# Altium PCB SOLC5-G031.PcbDoc
Units mm, origin at the board's own origin, x right, y up, seen from the top; angles counter-clockwise.
Board outline 110 x 89 mm, 2 copper layers (Top Layer, Bottom Layer), stack 1.536 mm thick; 72 components, 48 nets, 273 pads, 265 vias.
Unrouted connection lines stored in the file: 18.
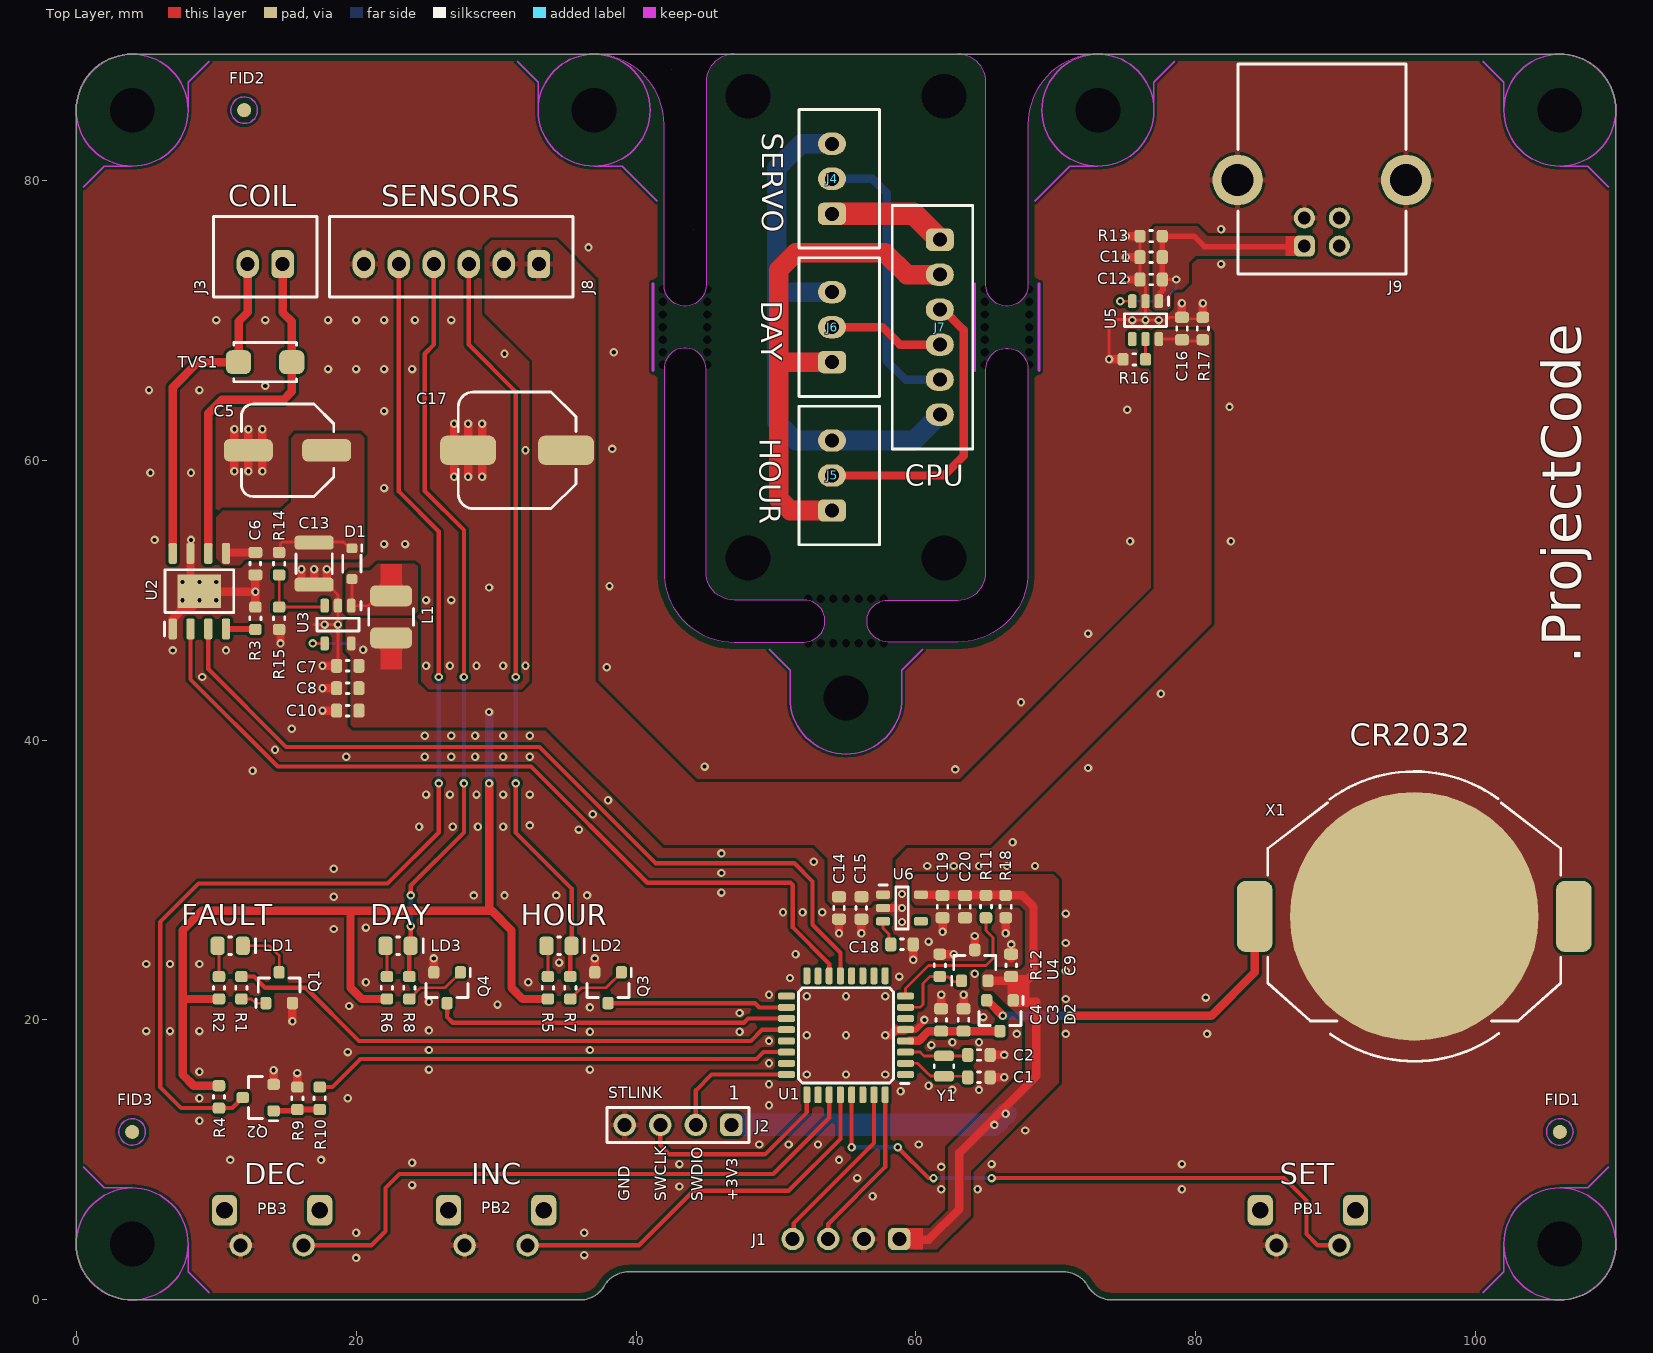
[diagram p0: Top Layer view]
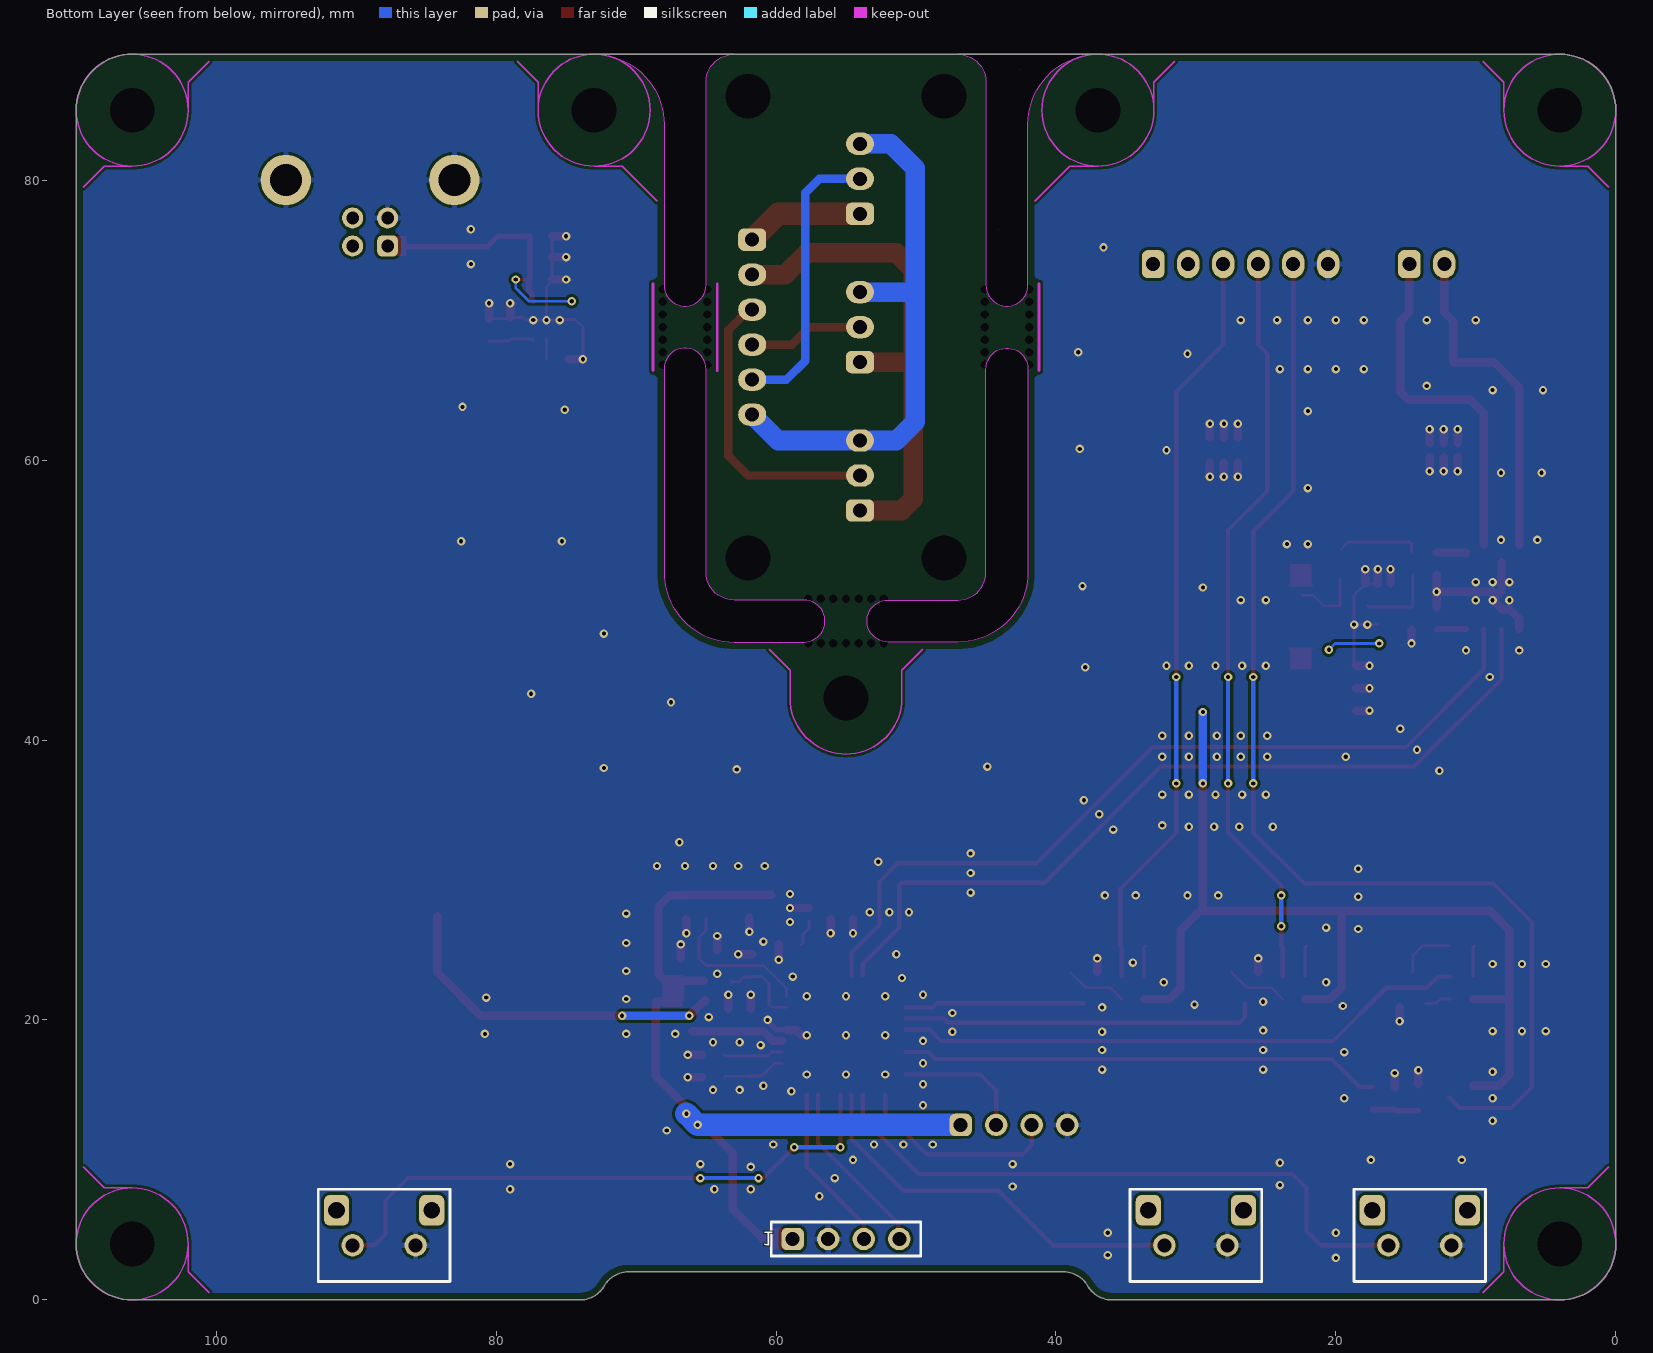
[diagram p1: Bottom Layer view, seen from below]

## Layer stack, top to bottom
Top Solder: solder mask 0.0254, SM-001, Dk 4
Top Layer: signal copper 0.018
Dielectric 1: core 1.5, FR-4 TG140, Dk 3.96
Bottom Layer: signal copper 0.018
Bottom Solder: solder mask 0.0254, SM-001, Dk 4

## Board outline
4,0 36,0 ccw(c36,2) 37.732,1 cw(c39.464,0) 39.464,2 70.536,2 cw(c70.536,0) 72.268,1 ccw(c74,2) 74,0 106,0 ccw(c106,4) 110,4 110,85 ccw(c106,85) 106,89 73,89 63,89 4,89 ccw(c4,85) 0,85 0,4 ccw(c4,4)
cut-out: 47,50 cw(c47,52) 45,52 45,66.503 ccw(c43.5,66.5) 42,66.498 42,52 ccw(c47,52) 47,47 52,47 ccw(c52,48.5) 52,50
cut-out: 42,72.5 42,84 ccw(c37,84) 37,89 47,89 ccw(c47,87) 45,87 45,72.5 cw(c43.5,72.5)
cut-out: 58,47 cw(c58,48.5) 58,50 57.996,50 63,50 ccw(c63,52) 65,52 65,66.5 cw(c66.5,66.5) 68,66.5 68,52 cw(c63,52) 63,47
cut-out: 65,72.5 65,87 ccw(c63,87) 63,89 73,89 ccw(c73,84) 68,84 68,72.5 cw(c66.5,72.5)
cut-out: 42.5,87.9
cut-out: 44.1,76.45

## Design rules (kind name [scope] priority, off if disabled: settings)
AcuteAngle [All] p1: minimum=0.00000000000000E+0000 checktracksonly=TRUE
AssemblyTestpoint [All] p1: testpointundercomponent=TRUE minsize=1 maxsize=2.5 preferedsize=1.5 minholesize=0 maxholesize=1 preferedholesize=0.8 testpointgrid=0.025 usegrid=TRUE gridtolerance=0 allowsidetop=TRUE allowsidebottom=TRUE
BoardOutlineClearance [(OnLayer('Top Layer') OR OnLayer('Bottom Layer'))] p1: gap=0.5 ignorepadtopadclearanceinfootprint=FALSE
Clearance Clearance_J2 [HasFootprint('HLE-120-02-F-DV-BE')] p1: gap=0.2 ignorepadtopadclearanceinfootprint=FALSE except(0: Arc-Hole Track-Hole SMDPad-THPad SMDPad-Hole THPad-Hole Via-Hole Fill-Hole Poly-Hole Region-Hole Text-Hole)
Clearance [All] p2: gap=0.2 ignorepadtopadclearanceinfootprint=FALSE except(0: Arc-Hole Track-Hole SMDPad-Hole THPad-Hole Via-Hole Fill-Hole Poly-Hole Region-Hole Text-Hole)
ComponentClearance "ComponentClearance FID" [Footprint Like('FID-1*')] p1: gap=0 collisioncheckmode=3 verticalgap=0 showdistances=FALSE
ComponentClearance ComponentClearance_SCAP [HasFootprint('C-SCCT20B106PRB-ORIZ')] p2: gap=0 collisioncheckmode=3 verticalgap=0 showdistances=FALSE
ComponentClearance ComponentClearance_EXT [HasFootprint('SSQ-120-03-D-BOTTOM')] p3: gap=0 collisioncheckmode=3 verticalgap=0 showdistances=FALSE
ComponentClearance [All] p4: gap=0.2 collisioncheckmode=3 verticalgap=0.2 showdistances=FALSE
DiffPairsRouting [All] p1: maxlimit=0.4 minlimit=0.2 mostfreqgap=0.2 toplayer_minwidth=0.3 toplayer_maxwidth=0.4 toplayer_prefwidth=0.3 bottomlayer_minwidth=0.3 bottomlayer_maxwidth=0.4 bottomlayer_prefwidth=0.3 maxuncoupledlength=12
FabricationTestpoint [All] p1: side=3 testpointundercomponent=TRUE minsize=1 maxsize=2.5 preferedsize=1.5 minholesize=0 maxholesize=1 preferedholesize=0.8 testpointgrid=0.025 allowsidetop=TRUE allowsidebottom=TRUE usegrid=TRUE gridtolerance=0
Height [All] p1: minheight=0 maxheight=50 prefheight=12
HoleSize [All] p1: absolutevalues=TRUE maxlimit=6 minlimit=0.3 maxpercent=80.000 minpercent=20.000
HoleToHoleClearance [All] p1: gap=0.3 allowstackedmicrovias=TRUE
MinimumAnnularRing [All] p1: minimumring=0.15
MinimumSolderMaskSliver [All] p1: minsoldermaskwidth=0.15
PlaneClearance [All] p1: clearance=0.3
PlaneConnect PlaneConnect_GND [(InNet('GND') and IsPad)] p1: pad.planeconnectstyle=Relief pad.reliefexpansion=0.3 pad.reliefentries=4 pad.reliefconductorwidth=0.5 pad.reliefairgap=0.2 via.planeconnectstyle=Direct via.reliefexpansion=0.3 via.reliefentries=4 via.reliefconductorwidth=0.5 via.reliefairgap=0.2
PlaneConnect [All] p2: planeconnectstyle=Direct reliefexpansion=0.5 reliefentries=4 reliefconductorwidth=0.2 reliefairgap=0.2
PolygonConnect [All] p1: thpad.connectstyle=Relief thpad.reliefconductorwidth=0.4 thpad.reliefentries=4 thpad.polygonreliefangle="90 Angle" thpad.airgapwidth=0.2 smdpad.connectstyle=Direct smdpad.reliefconductorwidth=0.3 smdpad.reliefentries=4 smdpad.polygonreliefangle="90 Angle" smdpad.airgapwidth=0.2 via.connectstyle=Direct via.reliefconductorwidth=0.2 via.reliefentries=4 via.polygonreliefangle="90 Angle" via.airgapwidth=0.2
RoutingCorners [All] p1: cornerstyle=45-Degree minsetback=0.5 maxsetback=2
RoutingVias [All] p1: holewidth=0.3 width=0.6 viastyle="Through Hole" minholewidth=0.3 minwidth=0.6 maxholewidth=0.6 maxwidth=1
SMDEntry [All] p1: side=TRUE corner=FALSE anyangle=TRUE
SMDToCorner [All] p1: distance=0
SilkToSilkClearance [All] p1: silktosilkclearance=0.1
SilkToSolderMaskClearance [IsPad] p1: minsilkscreentomaskgap=0.1 clearancetoexposedcopper=FALSE
SolderMaskExpansion SolderMaskExpansion_Via [IsVia] p1: expansion=0.102 istentingtop=TRUE
SolderMaskExpansion SolderMaskExpansion-NPTH [PadIsPlated = 'False'] p2: expansion=0.1 istentingtop=FALSE soldermaskfromhole=TRUE
SolderMaskExpansion [All] p3: expansion=0.05 istentingtop=FALSE
SupplyNets SupplyNets_GND [InNet('GND')] p1: voltage=0,000
SupplyNets SupplyNets+5V [InNet('+5V')] p2: voltage=5,000
SupplyNets SupplyNets+3V3 [InNet('+3V3')] p3: voltage=3,000
UnRoutedNet UnRoutedNet_No_GND [not InNet('GND')] p1: checkbadconnections=TRUE
Width [All] p1: maxlimit=5 minlimit=0.2 preferedwidth=0.2 minimp=50.000000 maximp=50.000000 favimp=50.000000
16 further rules are at their usual default settings.

## Components (designator, comment, footprint, x,y, rotation, side; value= is the part's Value field where it differs from the comment)
C1 "6pF" C0603-H90 64.5,15.9 r180 top value=6p
C2 "6pF" C0603-H90 64.5,17.5 r180 top value=6p
C3 "4.7µF" C0603-H90 63.4,20 r270 top value=4.7u
C4 "100nF" C0603-H90 61.8,20 r270 top value=100n
C5 "22µF" C-AE-C6-H60 15.1,60.7 r180 top value=22u
C6 "100nF" C0603-H90 12.8,52.6 r270 top value=100n
C7 "100nF" C0603-H90 19.4,45.3 r0 top value=100n
C8 "4.7µF" C0603-H90 19.4,43.7 r0 top value=4.7u
C9 "100nF" C0603-H90 66.8,23.9 r270 top value=100n
C10 "4.7µF" C0603-H90 19.4,42.1 r0 top value=4.7u
C11 "4.7µF" C0603-H90 76.8,74.5 r0 top value=4.7u
C12 "100nF" C0603-H90 76.8,72.9 r0 top value=100n
C13 "10µF" C1210-H250 17,52.6 r90 top value=10u
C14 "4.7µF" C0603-H90 54.5,28 r90 top value=4.7u
C15 "100nF" C0603-H90 56.1,28 r90 top value=100n
C16 "100nF" C0603-H90 79,69.4 r270 top value=100n
C17 "470µF" C-AE-D8-H102 31.5,60.7 r180 top value=470u
C18 "100nF" C0603-H90 59,25.4 r180 top value=100n
C19 "100nF" C0603-H90 61.9,28.1 r90 top value=100n
C20 "4.7µF" C0603-H90 63.5,28.1 r90 top value=4.7u
D1 "ZLLS400QTC" SOD-323 19.7,52.6 r270 top
D2 "BAT5405E6327HTSA1" SOT-23 66,20.3 r270 top
FID1 "Local Fiducial" FID-1-2MM 106,12 r0 top
FID2 "Local Fiducial" FID-1-2MM 12,85 r0 top
FID3 "Local Fiducial" FID-1-2MM 4,12 r0 top
J1 "OLED" SSQ-104-01-S-BOTTOM 55,4.35 r180 top
J2 "STLINK" HDR-V-1R-04P-5.8L 43,12.5 r270 top
J3 "COIL" "JST B2B-XH-A" 13.5,74 r180 top
J4 "SERVO" "JST B3B-XH-A" 54,80.1 r90 top
J5 "HOUR" "JST B3B-XH-A" 54,58.9 r90 top
J6 "DAY" "JST B3B-XH-A" 54,69.5 r90 top
J7 "CPU" "JST B6B-XH-A" 61.7,69.5 r270 top
J8 "SENSORS" "JST B6B-XH-A" 26.8,74 r180 top
J9 "POWER" 67068-8000 89,76.3 r180 top
L1 "10µH" IND-LQH43CN 22.5,48.8 r90 top value=10u
LD1 "FAULT" LED-0805-O 11,25.3 r180 top
LD2 "HOUR" LED-0805-O 34.5,25.3 r180 top
LD3 "DAY" LED-0805-O 23,25.3 r180 top
PB1 "SET" BUT-1-1825027-1-BOTTOM 88,3.9 r0 top locked
PB2 "INC" BUT-1-1825027-1-BOTTOM 30,3.9 r0 top locked
PB3 "DEC" BUT-1-1825027-1-BOTTOM 14,3.9 r0 top locked
Q1 "BSS138K-13" SOT-23 14.5,22.3 r90 top
Q2 "BSS138K-13" SOT-23 13,14.45 r180 top
Q3 "BSS138K-13" SOT-23 38,22.3 r270 top
Q4 "BSS138K-13" SOT-23 26.5,22.3 r270 top
R1 "470Ω" R0603-H55 11.8,22.3 r270 top value=470
R2 "4.7KΩ" R0603-H55 10.2,22.3 r270 top value=4.7K
R3 "1MΩ" R0603-H55 12.8,48.7 r270 top value=1M
R4 "4.7KΩ" R0603-H55 10.2,14.5 r90 top value=4.7K
R5 "4.7KΩ" R0603-H55 33.7,22.3 r270 top value=4.7K
R6 "4.7KΩ" R0603-H55 22.2,22.3 r270 top value=4.7K
R7 "470Ω" R0603-H55 35.3,22.3 r270 top value=470
R8 "470Ω" R0603-H55 23.8,22.3 r270 top value=470
R9 "53.6KΩ" R0603-H55 15.8,14.4 r270 top value=53.6K
R10 "470Ω" R0603-H55 17.4,14.4 r90 top value=470
R11 "4.7KΩ" R0603-H55 65,28.1 r90 top value=4.7K
R12 "22KΩ" R0603-H55 61.7,23.9 r270 top value=22K
R13 "4.7KΩ" R0603-H55 76.8,76 r0 top value=4.7K
R14 "1MΩ" R0603-H55 14.5,52.6 r90 top value=1M
R15 "53.6KΩ" R0603-H55 14.5,48.7 r90 top value=53.6K
R16 "22KΩ" R0603-H55 75.6,67.2 r180 top value=22K
R17 "4.7KΩ" R0603-H55 80.5,69.4 r270 top value=4.7K
R18 "4.7KΩ" R0603-H55 66.4,28.1 r90 top value=4.7K
TVS1 "26Vc" "DO-214AC-SMA-NO POL" 13.5,67 r0 top
U1 "STM32G031K8T6" LQFP32-7X7-P080 55,18.9 r180 top
U2 "DRV8871DDAR" SOIC-8-N-HT 8.8,50.635 r90 top
U3 "TPS61040DBVR" SOT-235 18.7,48.25 r270 top
U4 "MCP100T-300I/TT" SOT-23 64.2,23.9 r90 top
U5 "AP22653W6-7" SOT-236 76.4,70 r270 top
U6 "NCP730ASN330T1G" SOT-235 59,28 r0 top
X1 "BAT-HLD-001" BATT-TRAY-2032 95.6,27.4 r180 top
Y1 "32.768KHz" XTAL-ABM6 62,16.7 r90 top value=32.768K

## Footprints (in the part's own frame and the unit in brackets; to place one, negate y for a bottom-side part, rotate by r counter-clockwise, add the part's x,y. Pads: shape width x height; smd on the part's side, far side on the other; paste and mask are expansions set on the pad)
67068-8000 [mm] "USB Type B Right-Angle, Kinked Solder Tabs"
  rrect50% 1.5x1.5 hole 0.9: 1(1.25,1)
  round 1.5 hole 0.9: 2(-1.25,1) 3(-1.25,-1) 4(1.25,-1)
  round 3.6 hole 2.3: S(-6.02,-3.71) S(6.02,-3.71)
  silkscreen extent -6,-12 6,3.01, body extent -7.43,-13.99 7.43,3.01, height 11
BATT-TRAY-2032 [mm] "Battery Holder for CR2032"
  rrect50% 2.54x5.08 smd: 1(-11.4,0) 2(11.4,0)
  round 17.78 smd paste-17.78: 3(0,0)
  silkscreen extent -10.47,-10.35 10.47,10.35, body extent -11.45,-10.16 11.45,10.17, height 4.2
BUT-1-1825027-1-BOTTOM [mm] "Button 1-1825027-1 Bottom Side"
  round 1.6 hole 1: 1(-2.25,0) 2(2.25,0)
  rrect50% 1.8x2.2 hole 1.2: S(-3.4,2.5) S(3.4,2.5)
  body extent -4.2,-8.33 4.2,4, height 7.02
C0603-H90 [mm] "Chip Capacitor, 2-Leads, Body 1.60x0.80mm, IPC Medium Density"
  rrect50% 0.8x1 smd: 1(-0.8,0) 2(0.8,0)
  silkscreen extent -0.1,-0.37 0.1,0.38, body extent -0.8,-0.4 0.8,0.4, height 0.9
C1210-H250 [mm] "Chip Capacitor, 2-Leads, Body 3.10x2.60mm, IPC Medium Density"
  rrect50% 1x2.8 smd: 1(-1.5,0) 2(1.5,0)
  silkscreen extent -0.7,-1.3 0.7,1.3, body extent -1.6,-1.25 1.6,1.25, height 2.5
C-AE-C6-H60 [mm] "Aluminum Electrolytic Capacitor, Body D 6.3mm H 6.0mm, IPC Medium Density"
  rrect50% 3.5x1.6 smd: 1(-2.8,0) 2(2.8,0)
  silkscreen extent -3.3,-3.3 3.3,3.3, body extent -3.65,-3.3 3.65,3.3, height 5.91
C-AE-D8-H102 [mm] "Aluminum Electrolytic Capacitor, Body D 8mm H 10.2mm, IPC Medium Density"
  rrect50% 4x2.1 smd: 1(-3.5,0) 2(3.5,0)
  silkscreen extent -4.2,-4.17 4.2,4.17, body extent -4.85,-4.15 4.85,4.15, height 10.21
"DO-214AC-SMA-NO POL" [mm] "Molded Diode, 2-Leads, Body 4.25x2.67mm, IPC Medium Density"
  rrect50% 1.8x1.7 smd: 1(-1.9,0) 2(1.9,0)
  silkscreen extent -2.25,-1.4 2.25,1.4, body extent -2.47,-1.38 2.47,1.41, height 2.3
FID-1-2MM [mm] "Fiducial 1.0mm Diameter, 2.0mm Mask"
  round 1 smd paste-1 mask+0.5: F(0,0)
  Top Layer keep-out circle w0.1: c0,0 r0.95
HDR-V-1R-04P-5.8L [mm] "Breakaway Header - Vert - 1 Row - 4 Pos - 6 mm Lenght"
  rrect50% 1.6x1.6 hole 1: 1(0,3.81)
  round 1.6 hole 1: 2(0,1.27) 3(0,-1.27) 4(0,-3.81)
  silkscreen extent -1.25,-5.08 1.25,5.08, body extent -1.25,-5.08 1.25,5.08, height 8.35
IND-LQH43CN [mm] "Inductor, 2-Leads.4.5x3.2mm, IPC Medium Density"
  rrect50% 1.5x3 smd: 1(-1.5,0) 2(1.5,0)
  Top Layer region: -2.2,-0.95 -2.4,-0.75 -3.75,-0.75 -3.75,0.75 -2.4,0.75 -2.2,0.95
  Top Layer region: 2.2,0.95 2.4,0.75 3.75,0.75 3.75,-0.75 2.4,-0.75 2.2,-0.95
  silkscreen extent -0.6,-1.6 0.6,1.6, body extent -2.25,-1.6 2.25,1.6, height 2.81
"JST B2B-XH-A" [mm] "Connector JST B2B-XH-A"
  rrect50% 1.6x2 hole 1: 1(-1.25,0)
  oval 1.6x2 hole 1: 2(1.25,0)
  silkscreen extent -3.7,-3.4 3.7,2.35, body extent -3.7,-3.37 3.7,2.38, height 7
"JST B3B-XH-A" [mm] "Connector JST B3B-XH-A"
  rrect50% 1.6x2 hole 1: 1(-2.5,0)
  oval 1.6x2 hole 1: 2(0,0) 3(2.5,0)
  silkscreen extent -4.95,-3.4 4.95,2.35, body extent -4.95,-3.37 4.95,2.38, height 7
"JST B6B-XH-A" [mm] "Connector JST B6B-XH-A"
  rrect50% 1.6x2 hole 1: 1(-6.25,0)
  oval 1.6x2 hole 1: 2(-3.75,0) 3(-1.25,0) 4(1.25,0) 5(3.75,0) 6(6.25,0)
  silkscreen extent -8.7,-3.4 8.7,2.35, body extent -8.7,-3.37 8.7,2.38, height 7
LED-0805-O [mm] "Chip LED, Orange, 2-Leads, Body 2.00x1.25mm, IPC Medium Density"
  rrect50% 1x1.3 smd: 1(-0.9,0) 2(0.9,0)
  silkscreen extent -1.8,-0.62 0.1,0.63, body extent -1,-0.62 1,0.63, height 1.1
LQFP32-7X7-P080 [mm] "LQFP32 Package"
  rrect50% 1.2x0.5 smd: 1(-4.25,2.8) 2(-4.25,2) 3(-4.25,1.2) 4(-4.25,0.4) 5(-4.25,-0.4) 6(-4.25,-1.2) 7(-4.25,-2) 8(-4.25,-2.8) 17(4.25,-2.8) 18(4.25,-2) 19(4.25,-1.2) 20(4.25,-0.4) 21(4.25,0.4) 22(4.25,1.2) 23(4.25,2) 24(4.25,2.8)
  rrect50% 0.5x1.2 smd: 9(-2.8,-4.25) 10(-2,-4.25) 11(-1.2,-4.25) 12(-0.4,-4.25) 13(0.4,-4.25) 14(1.2,-4.25) 15(2,-4.25) 16(2.8,-4.25) 25(2.8,4.25) 26(2,4.25) 27(1.2,4.25) 28(0.4,4.25) 29(-0.4,4.25) 30(-1.2,4.25) 31(-2,4.25) 32(-2.8,4.25)
  silkscreen extent -4.5,-3.4 3.4,3.45, body extent -4.5,-4.5 4.5,4.5, height 1.63
R0603-H55 [mm] "Chip Resistor, 2-Leads, Body 1.60x0.80mm, IPC Medium Density"
  rrect50% 0.8x0.9 smd: 1(-0.8,0) 2(0.8,0)
  silkscreen extent -0.1,-0.4 0.1,0.4, body extent -0.8,-0.4 0.8,0.4, height 0.55
SOD-323 [mm] "SODJL, 2-Leads,"
  rrect50% 0.7x0.8 smd: 1(-1.1,0) 2(1.1,0)
  silkscreen extent -1.35,-0.65 0.6,0.7, body extent -1.34,-0.65 1.34,0.65, height 0.95
SOIC-8-N-HT [mm] "SOIC 8 Pin - Thermal Pad - TI R-PDSO-G8"
  rrect50% 1.5x0.6 smd: 1(-2.7,1.905) 2(-2.7,0.635) 3(-2.7,-0.635) 4(-2.7,-1.905) 5(2.7,-1.905) 6(2.7,-0.635) 7(2.7,0.635) 8(2.7,1.905)
  rect 2.4x3.1 smd paste-3.1 mask+0: 9(0,0)
  silkscreen extent -3.2,-2.46 1.52,2.5, body extent -3,-2.45 3,2.45, height 1.57
SOT-23 [mm] "SOT23, 3-Leads, Body 2.90x2.45mm, Pitch 0.95mm, IPC Medium Density"
  rrect50% 0.9x0.8 smd: 1(-1.1,0.95) 2(-1.1,-0.95) 3(1.1,0)
  silkscreen extent -1.4,-1.5 0.7,1.65, body extent -1.25,-1.5 1.25,1.5, height 1.1
SOT-235 [mm] "SOT23, 5-Leads, Body 2.85x2.80mm, Pitch 0.95mm, IPC Medium Density"
  rrect50% 1x0.6 smd: 1(-1.35,0.95) 2(-1.35,0) 3(-1.35,-0.95) 4(1.35,-0.95) 5(1.35,0.95)
  silkscreen extent -1.65,-1.5 0.45,1.65, body extent -1.5,-1.5 1.5,1.5, height 1.45
SOT-236 [mm] "SOT23, 6-Leads, Body 2.85x2.80mm, Pitch 0.95mm, IPC Medium Density"
  rrect50% 1x0.6 smd: 1(-1.35,0.95) 2(-1.35,0) 3(-1.35,-0.95) 4(1.35,-0.95) 5(1.35,0) 6(1.35,0.95)
  silkscreen extent -1.65,-1.5 0.45,1.65, body extent -1.5,-1.5 1.5,1.5, height 1.45
SSQ-104-01-S-BOTTOM [mm] "BPost Socket Header Vert - 1 Row - 4 Pos - 3 mm Lenght - Bottom Side"
  rrect50% 1.6x1.6 hole 1: 1(-3.81,0)
  round 1.6 hole 1: 2(-1.27,0) 3(1.27,0) 4(3.81,0)
  body extent -5.33,-1.21 5.33,1.21, height 8.51
XTAL-ABM6 [mm] "Abracon Crystal ABM6 Series"
  rrect50% 0.75x1.4 smd: 1(-0.725,0) 2(0.725,0)
  silkscreen extent -0.1,-0.7 0.1,0.7, body extent -1,-0.6 1,0.6, height 0.61

## Part data
C1 C2: library part CGA3E2C0G1H060D080AA, "Cap 0603 Case Ceramic 6pF 50V C0G", Case=0603, Dielectric=C0G, Manufacturer=TDK, Voltage Rating=50V, Capacitance=6pF, ComponentLink1Description="Data Sheet", ComponentLink1URL=https://product.tdk.com/system/files/dam/doc/product/capacitor/ceramic/mlcc/catalog/mlcc_automotive_general_en.pdf, Manufacturer Part Number=CGA3E2C0G1H060D080AA, Mount="Surface Mount"
C3 C8 C10 C11 C14 C20: library part C1608X7S1A475K080AC, "Cap 0603 Case Ceramic 4.7uF 10V X7S", Capacitance=4.7uF, Case=0603, Dielectric=X7S, Manufacturer=TDK, Voltage Rating=50V, ComponentLink1Description="Data Sheet", ComponentLink1URL=https://product.tdk.com/system/files/dam/doc/product/capacitor/ceramic/mlcc/catalog/mlcc_commercial_general_en.pdf, Manufacturer Part Number=C1608X7S1A475K080AC, Mount="Surface Mount"
C4 C6 C7 C9 C12 C15 C16 C18 C19: library part CGA3E2X7R1H104K080AA, "Cap 0603 Case Ceramic 100nF 50V X7R", Case=0603, Dielectric=X7R, Manufacturer=TDK, Voltage Rating=50V, Capacitance=100nF, ComponentLink1Description="Data Sheet", ComponentLink1URL=https://product.tdk.com/system/files/dam/doc/product/capacitor/ceramic/mlcc/catalog/mlcc_commercial_general_en.pdf, Manufacturer Part Number=CGA3E2X7R1H104K080AA, Mount="Surface Mount"
C5: library part EEE-FK1H220P, "Cap Electrolytic Alu 22uF 50V 20% 165mA 2000h 105C Automotive, Case D", Capacitance=22uF, Case=D, Manufacturer=Panasonic, Resistance=0.88R, Voltage Rating=50V, ComponentLink1Description="Data Sheet", ComponentLink1URL=https://datasheet.ciiva.com/3773/41677623s8437994n1386-3773397.pdf, Manufacturer Part Number=EEE-FK1H220P, Mount="Surface Mount"
C13: library part CL32B106KBJNNWE, "Cap 1210 Case Ceramic 10uF 50V X7R 10%", Capacitance=10uF, Case=1210, Dielectric=X7S, Manufacturer=Samsung, Voltage Rating=50V, ComponentLink1Description="Data Sheet", ComponentLink1URL=https://www.mouser.com/datasheet/2/585/MLCC-1837944.pdf, Manufacturer Part Number=CL32B106KBJNNWE, Mount="Surface Mount"
C17: library part EEE-FK1C471P, "Cap Electrolytic Alu 470uF 16V 20% (10 X 10.2mm) SMD 600mA 2000h 105C Automotive T/R", Capacitance=470uF, Case=F, Manufacturer=Panasonic, Resistance=0.16R, Voltage Rating=16V, ComponentLink1Description="Data Sheet", ComponentLink1URL=https://datasheet.ciiva.com/3773/41677623s8437994n1386-3773397.pdf, Manufacturer Part Number=EEE-FK1C471P, Mount="Surface Mount"
D1: "Diode Schottky 40V 0.5A, Vf 480mV, 2-Pin SOD323", Case=SOD323, Current Rating=0.5A, Manufacturer="Diodes Incorporated", ComponentLink1Description="Data Sheet", ComponentLink1URL=https://eu.mouser.com/datasheet/2/115/ZLLS400Q-959647.pdf, Manufacturer Part Number=ZLLS400QTC, Mount="Surface Mount"
D2: "Diode Schottky, Common cathode, 40V 0.3A 3-Pin SOT-323", Case=SOT-23, Current Rating=0.3A, Manufacturer="Infineon Technologies", ComponentLink1Description="Data Sheet", ComponentLink1URL=https://www.infineon.com/dgdl/Infineon-BAT54SERIES-DS-v01_01-en.pdf?fileId=db3a304314dca3890115190b74210ea6, Manufacturer Part Number=BAT5405E6327HTSA1, Mount="Surface Mount"
FID1 FID2 FID3: library part FID-1-2MM, "Fiducial 1.0mm Diameter, 2.0mmil Mask"
J1: library part SSQ-104-01-T-S, "Conn Post Socket Header Vert - 1 Row - 4 Pos - 3 mm Lenght - Tin", Current Rating=3A, Manufacturer=Samtec, ComponentLink1Description="Data Sheet", ComponentLink1URL=https://datasheet.ciiva.com/717/eng-cd-146256-g-146256-c-dwg-717712.pdf, Manufacturer Part Number=SSQ-104-01-T-S, Mount="Through Hole"
J2: library part 22-28-4043, "Breakaway Header Vert - 1 Row - 4 Pos - 6 mm Lenght - Gold", Current Rating=4A, Manufacturer=Molex, Voltage Rating=250V, ComponentLink1Description="Data Sheet", ComponentLink1URL=https://datasheet.ciiva.com/6814/022284363-sd-6814049.pdf, Manufacturer Part Number=22-28-4043, Mount="Through Hole"
J3: library part B2B-XH-A(LF)(SN), "Conn Shrouded, Series JST XH, 2 Pos Header,(2.50mm) Through Hole, Vertical Tin", Current Rating=3A, Manufacturer=JST, Voltage Rating=250V, ComponentLink1Description="Data Sheet", ComponentLink1URL=https://datasheet.ciiva.com/726/exh-726400.pdf, Manufacturer Part Number=B2B-XH-A(LF)(SN), Mount="Through Hole"
J4 J5 J6: library part B3B-XH-A(LF)(SN), "Conn Shrouded, Series JST XH, 3 Pos Header,(2.50mm) Through Hole, Vertical Tin", Current Rating=3A, Manufacturer=JST, Voltage Rating=250V, ComponentLink1Description="Data Sheet", ComponentLink1URL=https://datasheet.ciiva.com/726/exh-726400.pdf, Manufacturer Part Number=B3B-XH-A(LF)(SN), Mount="Through Hole"
J7 J8: library part B6B-XH-A(LF)(SN), "Conn Shrouded, Series JST XH, 6 Pos Header, (2.50mm) Through Hole, Vertical Tin", Current Rating=3A, Manufacturer=JST, Voltage Rating=250V, ComponentLink1Description="Data Sheet", ComponentLink1URL=https://datasheet.ciiva.com/726/exh-726400.pdf, Manufacturer Part Number=B6B-XH-A(LF)(SN), Mount="Through Hole"
J9: library part 67068-8000, "Conn USB Type B Right-Angle, Kinked Solder Tabs", Current Rating=1.5A, Manufacturer=Molex, Voltage Rating=30V, ComponentLink1Description="Data Sheet", ComponentLink1URL=https://www.molex.com/pdm_docs/sd/670688000_sd.pdf, Manufacturer Part Number=67068-8000, Mount="Through Hole"
L1: library part LQH43CN100K03L, "Inductor Power LQH43CN Series, 10uH, 0.65 A, 0.24 ohm, SMD", Manufacturer=Murata, ComponentLink1Description="Data Sheet", ComponentLink1URL=https://search.murata.co.jp/Ceramy/image/img/P02/JELF243A-0042.pdf, Inductance=10µH, Manufacturer Part Number=LQH43CN100K03L, Mount="Surface Mount"
LD1 LD2 LD3: library part LTST-C170KFKT, "LED 0805 Top Orange 605nm 2-Pin", Case=0805, Manufacturer="Vishay Lite-On", ComponentLink1Description="Data Sheet", ComponentLink1URL=https://www.mouser.com/datasheet/2/239/Lite-On-LTST-C170KFKT-1175423.pdf, Manufacturer Part Number=LTST-C170KFKT, Mount="Surface Mount"
PB1 PB2 PB3: library part 1-1825027-1, "Tactile Switch, Round Stem, Color ivory, Lenght 5.74mm, Right Angle, Through Hole.", Current Rating="50 mA", Manufacturer="TE Connectivity", Voltage Rating=24V, ComponentLink1Description="Data Sheet", ComponentLink1URL=https://www.mouser.com/datasheet/2/418/NG_CD_1825027_G4-659945.pdf, Manufacturer Part Number=1-1825027-1, Mount="Through Hole"
Q1 Q2 Q3 Q4: "Mosfet N 50V Vds 20V Vgs ESD 1.4R SOT-23", Case=SOT-23, Manufacturer=Diodes, ComponentLink1Description="Data Sheet", ComponentLink1URL=https://www.diodes.com/assets/Datasheets/BSS138K.pdf, Manufacturer Part Number=BSS138K-13, Mount="Surface Mount"
R1 R7 R8 R10: library part RC0603FR-07470RL, "Resistor 0603 Case 470R 1% 1/10W", Case=0603, Manufacturer=Yageo, Resistance=470R, Voltage Rating=150V, ComponentLink1Description="Data Sheet", ComponentLink1URL=https://datasheet.ciiva.com/11808/0900766b8106beab-11808155.pdf, Manufacturer Part Number=RC0603FR-07470RL, Mount="Surface Mount"
R2 R4 R5 R6 R11 R13 R17 R18: library part RC0603FR-074K7L, "Resistor 0603 Case 4.7KR 1% 1/10W", Case=0603, Manufacturer=Yageo, Resistance=4.7kR, Voltage Rating=150V, ComponentLink1Description="Data Sheet", ComponentLink1URL=https://datasheet.ciiva.com/11808/0900766b8106beab-11808155.pdf, Manufacturer Part Number=RC0603FR-074K7L, Mount="Surface Mount"
R3 R14: library part RC0603FR-071ML, "Resistor 0603 Case 1MR 1% 1/10W", Case=0603, Manufacturer=Yageo, Resistance=1MR, Voltage Rating=150V, ComponentLink1Description="Data Sheet", ComponentLink1URL=https://datasheet.ciiva.com/2519/pyu-r-int-thick-7-2519712.pdf, Manufacturer Part Number=RC0603FR-071ML, Mount="Surface Mount"
R9 R15: library part RC0603FR-0753K6L, "Resistor 0603 Case 53.6KR 1% 1/10W", Case=0603, Manufacturer=Yageo, Resistance=53.6kR, Voltage Rating=150V, ComponentLink1Description="Data Sheet", ComponentLink1URL=https://datasheet.ciiva.com/2457/pyu-r-int-thick-7-2457521.pdf, Manufacturer Part Number=RC0603FR-0753K6L, Mount="Surface Mount"
R12 R16: library part RC0603FR-0722KL, "Resistor 0603 Case 22KR 1% 1/10W", Case=0603, Manufacturer=Yageo, Resistance=22kR, Voltage Rating=150V, ComponentLink1Description="Data Sheet", ComponentLink1URL=https://datasheet.ciiva.com/2457/pyu-r-int-thick-7-2457521.pdf, Manufacturer Part Number=RC0603FR-0722KL, Mount="Surface Mount"
TVS1: library part SMAJ26CA, "TVS Diode Bidirectional 26Vs, 42.1Vc, 9.5 Amp, SMA", Case=SMA, Manufacturer=Littelfuse, ComponentLink1Description="Data Sheet", ComponentLink1URL=https://datasheet.ciiva.com/332/littelfuse-tvs-diode-smdj-datasheet-pdf-332997.pdf, Manufacturer Part Number=SMAJ26CA, Mount="Surface Mount"
U1: "STM32 Arm Cortex-M0+ MCU, 64 Kbytes Flash 8 Kbytes RAM, 64 MHz CPU, Package LQFP32", Case=LQFP32, Frequency=64MHz, Manufacturer=STMicroelectronics, ComponentLink1Description="Data Sheet", ComponentLink1URL=https://www.st.com/resource/en/datasheet/stm32g031k8.pdf, Manufacturer Part Number=STM32G031K8T6, Mount="Surface Mount"
U2: "Motor Driver H-bridge 45V, 3.6A, Integrated current sensing SOIC-8 PowerPAD -40 to 125", Case=SOIC-8, Manufacturer="Texas Instruments", ComponentLink1Description="Data Sheet", ComponentLink1URL=https://www.ti.com/lit/ds/symlink/drv8871.pdf?HQS=dis-mous-null-mousermode-dsf-pf-null-wwe&ts=1619428375041&ref_url=https%253A%252F%252Fwww.mouser.it%252F, Manufacturer Part Number=DRV8871DDAR, Mount="Surface Mount"
U3: "Conv DC-DC Sync Step-Up 28V .45A 1MHz SOT-23-5", Case=STO-235, Manufacturer="Texas Instruments", ComponentLink1Description="Data Sheet", ComponentLink1URL=http://www.ti.com/lit/ds/symlink/tps54308.pdf, Manufacturer Part Number=TPS61040DBVR, Mount="Surface Mount"
U4: "Power Supervisor 3.00V Low SOT23", Case=SOT-23-3, Manufacturer=Microchip, ComponentLink1Description="Data Sheet", ComponentLink1URL=https://ww1.microchip.com/downloads/en/DeviceDoc/11187f.pdf, Manufacturer Part Number=MCP100T-300I/TT, Mount="Surface Mount"
U5: "Smart High-Side Power Distribution Switches, 1 Output, 5.5V, Adjustable current limit 2.1A Max, Rdson 65mΩ, SOT-23-6", Case=SOT-23-6, Manufacturer="Diodes Incorporated", ComponentLink1Description="Data Sheet", ComponentLink1URL=https://www.diodes.com/assets/Datasheets/AP22652_53_52A_53A.pdf, Manufacturer Part Number=AP22653W6-7, Mount="Surface Mount"
U6: "LDO 3.3V 150mA Out  38Vin 290mV Dropout, Quiescent current 1 uA SOT-23-5", Case=SOT-23-5, Manufacturer="ON Semiconductor", ComponentLink1Description="Data Sheet", ComponentLink1URL=https://eu.mouser.com/datasheet/2/308/1/NCP730_D-2317345.pdf, Manufacturer Part Number=NCP730ASN330T1G, Mount="Surface Mount"
X1: "Holder Battery Coin 20mm", Manufacturer=Linx, ComponentLink1Description="Data Sheet", ComponentLink1URL=https://datasheet.ciiva.com/4/bat-hld-001-4035.pdf, Manufacturer Part Number=BAT-HLD-001, Mount="Surface Mount"
Y1: library part ABS06-32.768KHZ-6-1-T, "Quartz 32.768kHz ±10ppm Crystal 6pF 90 kOhm -40°C ~ 85°C  Surface Mount 2-SMD", Case=ABM6, Frequency=32.768kHz, Manufacturer=Abracon, ComponentLink1Description="Data Sheet", ComponentLink1URL=https://datasheet.ciiva.com/15214/getdatasheetpartid-722402-15214953.pdf, Manufacturer Part Number=ABS06-32.768KHZ-6-1-T, Mount="Surface Mount"

## Free pads (board coordinates)
  round 0 hole 0.6 unplated mask+0.2: MB(41.9,66.8) MB(41.9,67.7) MB(41.9,68.6) MB(41.9,69.5) MB(41.9,70.4) MB(41.9,71.3) MB(41.9,72.2) MB(45.1,66.8) MB(45.1,67.7) MB(45.1,68.6) MB(45.1,69.5) MB(45.1,70.4) MB(45.1,71.3) MB(45.1,72.2) MB(52.3,50.1) MB(52.3,46.9) MB(53.2,50.1) MB(53.2,46.9) MB(54.1,50.1) MB(54.1,46.9) MB(55,50.1) MB(55,46.9) MB(55.9,50.1) MB(55.9,46.9) MB(56.8,50.1) MB(56.8,46.9) MB(57.7,50.1) MB(57.7,46.9) MB(64.9,66.8) MB(64.9,67.7) MB(64.9,68.6) MB(64.9,69.5) MB(64.9,70.4) MB(64.9,71.3) MB(64.9,72.2) MB(68.1,66.8) MB(68.1,67.7) MB(68.1,68.6) MB(68.1,69.5) MB(68.1,70.4) MB(68.1,71.3) MB(68.1,72.2)
  round 0 hole 3.2 unplated mask+2.5: MH(4,4) MH(4,85) MH(37,85) MH(48,53) MH(48,86) MH(55,43) MH(62,53) MH(62,86) MH(73,85) MH(106,4) MH(106,85)

## Via types
v1: diameter 0.6, hole 0.3, Top Layer to Bottom Layer, tented both sides, 259 vias
v2: diameter 0.6, hole 0.3, Top Layer to Bottom Layer, tented bottom, 6 vias

## Nets (pads, with @x,y where several pads share a name; then routed paths per layer and width w, separated by ;. In a path a pad name is that pad's centre, name@x,y a point inside that pad or via, vN(x,y) a via of type N, cw(c..) or ccw(c..) an arc to the next point about the centre after c; other vN are vias at no path point)
+3V: C3.2 C4.2 D2.3 U1.4 | length 6.7
  Top Layer w0.6: U1.4@59.55,18.5 60.2,18.5 60.9,19.2 C4.2 C3.2 D2.3
+3V3: C9.2 C19.2 C20.2 D2.1 J1.1 J2.1 R11.2 R18.2 U4.2 U6.5 | length 62
  Top Layer w0.6: J1.1@58.81,4.3 60.9,4.3 63.1,6.5 63.1,10.5 68.6,16 68.6,21.3 67.05,21.3 D2.1 66.95,21.45 66.85,21.55 66.85,22.75 C9.2@66.8,22.8 ; U6.5 61.9,28.95 63.5,28.95 65,28.95 66.35,28.95 R18.2 67.6,28.9 68.4,28.1 68.4,23.3 67.9,22.8 C9.2@66.8,22.8 ; U4.2 C9.2@66.8,22.8
  Bottom Layer w1.6: J2.1 v1(65.6,12.5) v1(66.4,13.3)
+5V: C7.2 C8.2 C10.2 C14.2 C15.2 C16.2 C17.1 J8.1 J8.2 L1.1 R2.2 R4.2 R5.2 R6.2 R17.2 U3.4 U3.5 U5.6 U6.1 | length 77.6
  Top Layer w0.2: v1(16.9,46.9) U3.4 ; U5.6 78.95,68.65 C16.2 79.1,68.5 R17.2@80.5,68.5
  Top Layer w0.6: R4.2 8.4,15.3 7.6,16.1 7.6,21.5 ; R2.2 7.6,21.5 ; R6.2 20.4,21.5 19.6,22.3 19.6,27.8 ; 29.5,27.8 19.6,27.8 ; 29.5,28 v1(29.5,36.9) ; 29.7,27.8 31.1,26.4 31.1,22.3 31.9,21.5 R5.2 ; 7.6,21.5 7.6,26.4 9,27.8 19.6,27.8
  Bottom Layer w0.2: v1(16.9,46.9) 20.05,46.9 v1(20.5,46.45)
  Bottom Layer w0.6: v1(29.5,36.9) v1(29.5,42)
+24V: C5.1 C6.1 C13.2 D1.1 R14.2 U2.5 | length 8
  Top Layer w0.2: R14.2@14.6,53.45 14.6,54.033 14.717,54.15 17,54.15 19.1,54.15 19.346,53.904 19.346,53.894 19.591,53.65 D1.1@19.6,53.65
  Top Layer w0.6: U2.5 10.705,53.4 C6.1
BTN_DEC: PB3.2 U1.27 | length 44.8
  Top Layer w0.3: PB3.2 21.1,3.9 22.1,4.9 22.1,8 23.1,9 49.8,9 53.8,13 U1.27
BTN_INC: PB2.2 U1.28 | length 28.6
  Top Layer w0.3: PB2.2 40.2,3.9 44.1,7.8 50.9,7.8 54.6,11.5 U1.28
BTN_SET: PB1.2 U1.29 | length 42.9
  Top Layer w0.3: v1(55.4,10.9) U1.29 ; v1(58.7,10.9) 60.9,8.7 v1(61.25,8.7) ; v1(65.4,8.7) 86.3,8.7 87.9,7.1 87.9,4.7 88.7,3.9 PB1.2
  Bottom Layer w0.3: v1(55.4,10.9) v1(58.7,10.9) ; v1(61.25,8.7) v1(65.4,8.7)
GND: C1.1 C2.1 C3.1 C4.1 C5.2 C6.2 C7.1 C8.1 C9.1 C10.1 C11.1 C12.1 C13.1 C14.1 C15.1 C16.1 C17.2 C18.1 C19.1 C20.1 J1.2 J2.4 J8.6 J9.4 J9.S PB1.1 PB2.1 PB3.1 Q1.2 Q2.2 Q3.2 Q4.2 R3.1 R9.1 R12.1 R13.1 R15.1 R16.2 R17.1 R18.1 U1.5 U2.1 U2.7 U2.9 U3.2 U4.3 U5.2 U6.2 X1.3 | length 83.5
  Top Layer w0.2: 17,48.25 v1(17.75,48.25) v1(18.7,48.25) ; C13.1@17,51.15 17.9,51.15 18.7,50.35 U3.2 v1(18.7,48.25) ; C7.1@18.7,45.35 v1(18.7,48.25) ; v1(73.8,67.2) 73.8,69.5 74.35,70.05 75.4,70.05 v1(75.45,70) v1(76.4,70) ; R13.1 C11.1 C12.1 76,72.783 76.4,72.383 U5.2 v1(76.4,70) ; R17.1@80.5,70.1 79.1,70.1 C16.1 78.1,70.2 77.9,70 v1(77.35,70) v1(76.4,70)
  Top Layer w0.4: U1.5 60,19.3 60.6,19.9 v1(60.6,20)
  Top Layer w0.6: U2.1 6.895,48.645 7.6,49.35 8.15,49.35 8.8,50 8.165,50.635 U2.7@8.165,52.7 ; U2.9 8.835,50.6 v1(12.8,50.6) ; v1(11.3,59.2) C5.2@11.3,60.2 ; C5.2@11.3,61.2 v1(11.3,62.2) ; v1(12.3,59.2) C5.2@12.3,60.2 ; C5.2@12.3,61.2 v1(12.3,62.2) ; R3.1 v1(12.8,50.6) ; C6.2 v1(12.8,50.6) ; v1(13.3,59.2) C5.2@13.3,60.2 ; C5.2@13.3,61.2 v1(13.3,62.2) ; Q2.2 v1(14.1,16.4) ; v1(14.6,46.9) R15.1@14.6,47.9 ; v1(15.45,19.9) Q1.2@15.45,20.9 ; R9.1 v1(15.8,16.2) ; C13.1@16.1,51.2 v1(16.1,52.2) ; C13.1@17,51.15 v1@17,52.15 ; v1(17.6,42.1) C10.1 ; v1(17.6,43.7) C8.1 ; v1(17.6,45.3) C7.1 ; C13.1@17.9,51.15 v1@17.9,52.15 ; Q4.2 v1(25.55,24.4) ; v1(27,58.804) C17.2@27,59.804 ; C17.2@27,61.596 v1(27,62.596) ; v1(28,58.804) C17.2@28,59.804 ; C17.2@28,61.596 v1(28,62.596) ; v1(29,58.804) C17.2@29,59.804 ; C17.2@29,61.596 v1(29,62.596) ; Q3.2 v1(37.05,24.4) ; v1(54.5,26.2) C14.1 ; v1(56.1,26.2) C15.1 ; U6.2 v1(59,28) ; v1(57.8,18.9) 58.166,18.9 58.516,19.25 59.15,19.25 U1.5@59.2,19.3 ; v1(59.8,24.3) C18.1 ; R12.1 v1(62.7,24.7) ; C4.1 v1(61.8,21.8) ; v1(61.9,26.3) C19.1 ; C3.1 v1(63.4,21.8) ; U4.3 v1(64.2,26) ; C1.1 v1(66.3,15.9) ; C2.1 v1(66.3,17.5) ; v1(66.4,26.2) R18.1@66.4,27.2 ; C9.1@66.8,24.4 v1(66.8,25.4) ; v1(73.8,67.2) R16.2 ; v1(75,72.9) C12.1 ; v1(75,74.5) C11.1 ; v1(75,76) R13.1 ; C16.1 v1(79,71.2) ; R17.1@80.5,70.1 v1(80.5,71.2)
  other v1: 20,3 36.3,3.2 20,4.8 36.3,4.8 56.9,7.4 61.8,7.9 64.4,7.9 79,7.9 43.1,8.1 24,8.2 55.8,8.7 61.8,9.5 43.1,9.7 65.4,9.7 79,9.7 24,9.8 11,10 17.5,10 54.5,10 48.8,11.1 50.9,11.1 53,11.1 60.2,11.1 67.8,12.1 8.8,12.8 49.5,13.9 8.8,14.4 19.4,14.4 58.9,14.9 62.6,15 64.5,15 60.9,15.3 49.5,15.4 52.2,16.1 55,16.1 57.8,16.1 8.8,16.3 25.2,16.45 36.7,16.45 49.5,16.9 19.4,17.7 25.2,17.85 36.7,17.85 61.1,18.2 62.6,18.4 64.5,18.4 49.5,18.5 52.2,18.9 55,18.9 67.2,19 70.7,19 80.8,19 36.7,19.15 47.4,19.15 5,19.2 6.7,19.2 8.8,19.2 25.2,19.25 64.8,20.2 47.4,20.5 36.7,20.9 19.5,21 30.1,21.1 25.2,21.3 70.7,21.5 80.7,21.6 52.2,21.7 55,21.7 57.8,21.7 49.5,21.8 20.7,22.7 32.3,22.7 51,23 58.8,23.1 64.2,23.3 70.7,23.5 5,24 6.7,24 8.8,24 34.5,24.1 51.4,24.7 70.7,25.5 60.9,25.6 18.4,26.5 20.7,26.6 59,27 70.7,27.6 50.5,27.7 51.9,27.7 53.3,27.7 18.4,28.8 28.4,28.9 30.6,28.9 34.3,28.9 36.5,28.9 59,29 46.1,29.1 46.1,30.5 18.4,30.8 60.8,31 62.7,31 64.5,31 66.5,31 68.5,31 52.7,31.3 46.1,31.9 66.9,32.7 35.9,33.6 24.5,33.8 26.9,33.8 28.7,33.8 30.5,33.8 32.4,33.9 36.9,34.7 38,35.7 25,36.1 26.7,36.1 28.6,36.1 30.5,36.1 32.4,36.1 12.6,37.8 62.8,37.9 72.3,38 44.9,38.1 19.3,38.8 24.9,38.8 26.8,38.8 28.5,38.8 30.5,38.8 32.4,38.8 14.2,39.3 24.9,40.3 26.8,40.3 28.5,40.3 30.5,40.3 32.4,40.3 15.4,40.8 67.5,42.7 77.5,43.3 9,44.5 37.9,45.2 25,45.3 26.7,45.3 28.6,45.3 30.5,45.3 32.1,45.3 6.9,46.4 10.7,46.4 72.3,47.6 25,50 26.8,50 29.5,50.9 38.1,51 17,52.2 17.9,52.2 22,54 23.5,54 75.3,54.2 82.5,54.2 5.6,54.3 8.2,54.3 22,58 5.3,59.1 8.2,59.1 32.1,60.7 38.3,60.8 22,63.5 75.1,63.6 82.4,63.8 5.2,65 8.8,65 13.5,65.3 18,66.5 20,66.5 22,66.5 24,66.5 30.6,67.6 38.4,67.7 10,70 13.5,70 18,70 20,70 22,70 24.2,70 26.8,70 81.8,74 36.6,75.2 81.8,76.5
  other v2: 7.6,49.985 8.8,49.985 10,49.985 7.6,51.285 8.8,51.285 10,51.285
HAL_DAY: J8.4 LD3.1 R8.1 | length 53.6
  Top Layer w0.3: R8.1 23.8,25.2 LD3.1 ; LD3.1 v1(23.9,26.7) ; v1(23.9,28.9) 23.9,29.6 27.7,33.4 v1(27.7,36.9) ; J8.4 25.55,68.25 24.9,67.6 24.9,57.8 27.7,55 v1(27.7,44.5)
  Bottom Layer w0.3: v1(23.9,26.7) 23.9,28.6 ; v1(27.7,36.9) v1(27.7,44.5)
HAL_HOUR: J8.3 LD2.1 R7.1 | length 54
  Top Layer w0.3: J8.3 28.05,68.25 31.4,64.9 v1(31.4,44.5) ; v1(31.4,36.9) 31.4,33.4 35.4,29.4 LD2.1 35.3,25.2 R7.1
  Bottom Layer w0.3: v1(31.4,36.9) v1(31.4,44.5)
I2C1_SCL: J1.3 U1.32 | length 12
  Top Layer w0.3: J1.3 53.73,5.43 57.8,9.5 U1.32
I2C1_SDA: J1.4 U1.31 | length 12.7
  Top Layer w0.3: J1.4 51.26,4.42 51.26,5.46 57,11.2 U1.31
LED_STAT: R1.1 U1.20 | length 41.2
  Top Layer w0.3: R1.1 12.7,23.1 13.5,22.3 16.4,22.3 20.2,18.5 48.2,18.5 49,19.3 U1.20
NetC1_2: C1.2 U1.2 Y1.1 | length 4.6
  Top Layer w0.2: U1.2@59.55,16.9 60.129,16.9 60.8,16.229 61.034,15.994 61.981,15.994 Y1.1 63.625,15.975 C1.2
NetC2_2: C2.2 U1.3 Y1.2 | length 4.3
  Top Layer w0.2: U1.3@59.55,17.7 60.3,17.7 60.575,17.425 63.625,17.425 C2.2
NetC11_2: C11.2 C12.2 J9.1 R13.2 U5.1 U5.3 | length 22.5
  Top Layer w0.2: v1(74.6,71.35) U5.3 ; C12.2 v1(78.6,72.9)
  Top Layer w0.4: U5.1 77.45,71.45 77.45,71.95 77.65,72.15 77.65,72.85 C12.2 C11.2 R13.2 79.85,76 80.6,75.25 88.11,75.25 J9.1@88.12,75.26
  Bottom Layer w0.2: v1(74.6,71.35) 77.65,71.35 78.6,72.3 v1(78.6,72.9)
NetC18_2: C18.2 U6.3 | length 1.9
  Top Layer w0.2: U6.3 57.65,26.55 58.08,26.12 58.08,25.52 C18.2
NetD1_2: D1.2 L1.2 U3.1 | length 4.9
  Top Layer w0.2: D1.2@19.7,51.45 19.7,49.65 U3.1 20.883,49.6 21.633,50.35 L1.2@22.4,50.35
NetD2_2: D2.2 X1.2 | length 24.9
  Top Layer w0.6: D2.2 65.05,21.35 65.15,21.25 65.25,21.25 v1(66.2,20.3) ; v1(71,20.3) 81.1,20.3 84.2,23.4 X1.2
  Bottom Layer w0.6: v1(66.2,20.3) v1(71,20.3)
NetJ3_1: J3.1 TVS1.2 U2.6 | length 25.4
  Top Layer w0.6: U2.6@9.435,53.935 9.435,63.335 10.4,64.3 14.8,64.3 15.4,64.9 TVS1.2 15.4,69.9 14.75,70.55 J3.1
NetJ3_2: J3.2 TVS1.1 U2.8 | length 24
  Top Layer w0.6: U2.8@6.895,53.935 6.895,65.195 8.7,67 TVS1.1 11.6,69.9 12.25,70.55 J3.2
NetJ4_1: J4.1 J7.1 | length 8.6
  Top Layer w1.6: J4.1 59.85,77.6 61.5,75.95 61.5,75.75 J7.1
NetJ4_2: J4.2 J7.5 | length 20.7
  Bottom Layer w0.6: J4.2 56.9,80.1 57.9,79.1 57.9,67.1 59.25,65.75 J7.5
NetJ4_3: J4.3 J5.3 J6.3 J7.6 | length 39.8
  Bottom Layer w1.4: J6.3 50.05,72 ; J4.3 51.8,82.6 50.05,80.85 50.05,72 ; J7.6 61.554,63.25 61.462,63.158 61.462,63.012 59.85,61.4 53.708,61.4 51.4,61.4 50.05,62.75 50.05,72
NetJ5_1: J5.1 J6.1 J7.2 | length 37
  Top Layer w1.4: J5.1 51.02,56.4 50.2,57.22 50.2,67 ; J6.1 50.2,67 ; J7.2 59.35,73.25 57.8,74.8 51.4,74.8 50.2,73.6 50.2,67
NetJ5_2: J5.2 J7.3 | length 21.3
  Top Layer w0.6: J5.2 62,58.9 63.4,60.3 63.4,69.3 61.95,70.75 J7.3
NetJ6_2: J6.2 J7.4 | length 8.2
  Top Layer w0.6: J6.2 57.6,69.5 58.85,68.25 J7.4
NetLD1_1: LD1.1 Q1.3 | length 4.1
  Top Layer w0.2: LD1.1 13.8,25.3 14.5,24.6 Q1.3
NetLD1_2: LD1.2 R2.1 | length 2.2
  Top Layer w0.2: LD1.2 10.2,25.2 R2.1
NetLD2_2: LD2.2 R5.1 | length 2.2
  Top Layer w0.2: LD2.2 33.7,25.2 R5.1
NetLD3_2: LD3.2 R6.1 | length 2.2
  Top Layer w0.2: LD3.2 22.2,25.2 R6.1
NetQ1_1: Q1.1 R1.2 | length 1.9
  Top Layer w0.2: R1.2 12.5,21.5 12.8,21.2 Q1.1
NetQ2_1: Q2.1 R9.2 R10.1 | length 3.3
  Top Layer w0.4: Q2.1 15.7,13.5 R9.2 R10.1
NetQ3_1: Q3.1 R7.2 | length 4.4
  Top Layer w0.2: R7.2 36.1,22.3 37.85,22.3 Q3.1
NetQ3_3: Q3.3 U1.18 | length 12.9
  Top Layer w0.3: Q3.3 48.5,21.2 48.8,20.9 U1.18
NetQ4_1: Q4.1 R8.2 | length 4.4
  Top Layer w0.2: R8.2 24.6,22.3 26.35,22.3 Q4.1
NetQ4_3: Q4.3 U1.19 | length 26.3
  Top Layer w0.3: 26.524,20.476 26.524,21.176 Q4.3 26.5,20.2 26.9,19.8 47.7,19.8 48,20.1 U1.19
NetR3_2: R3.2 U2.4 | length 2.1
  Top Layer w0.4: U2.4 12.765,47.935 R3.2
NetR10_2: R10.2 U1.22 | length 34.4
  Top Layer w0.3: R10.2 18.3,15.2 20.3,17.2 48.6,17.2 49.1,17.7 U1.22
NetR11_1: R11.1 U1.8 | length 10.8
  Top Layer w0.2: U1.8 59.25,22.25 60.9,23.9 65,23.9 65.5,24.4 65.5,25.9 65,26.4 R11.1
NetR12_2: R12.2 U1.7 U4.1 | length 6
  Top Layer w0.2: U1.7 60.3,20.9 60.5,21.1 60.5,22.6 61,23.1 R12.2 61.733,23.067 62.333,23.067 62.667,22.733 63.017,22.733 63.1,22.65 U4.1@63.225,22.775
NetR14_1: R14.1 R15.2 U3.3 | length 5.5
  Top Layer w0.2: R15.2 R14.1 ; R15.2@14.6,49.5 17.65,49.5 U3.3
NetR16_1: R16.1 U5.5 | length 1.5
  Top Layer w0.2: R16.1 U5.5
NetU1_13: U1.13 U2.3 | length 59.9
  Top Layer w0.3: U2.3 9.435,45.065 15,39.5 33.1,39.5 41.4,31.2 51.3,31.2 52.6,29.9 52.6,26.8 54.6,24.8 U1.13
NetU1_14: U1.14 U2.2 | length 60.3
  Top Layer w0.3: U2.2 8.165,44.335 14.4,38.1 32.5,38.1 40.8,29.8 51.024,29.8 51.2,29.624 51.2,26.6 53.8,24 U1.14
SERVO_PWM_BUF: J8.5 Q2.3 R4.1 | length 83
  Top Layer w0.3: Q2.3 11.85,14.45 11.65,14.25 11.65,14.2 11.15,13.7 R4.1 7.5,13.7 6,15.2 6,27 8.75,29.75 22.25,29.75 25.9,33.4 v1(25.9,36.9) ; J8.5 23.05,57.75 25.9,54.9 v1(25.9,44.5)
  Bottom Layer w0.3: v1(25.9,36.9) v1(25.9,44.5)
SW_CLK: J2.3 U1.25 | length 14.7
  Top Layer w0.3: J2.3 41.73,11.07 42.4,10.4 49.2,10.4 52.2,13.4 U1.25
SW_DIO: J2.2 U1.24 | length 9.4
  Top Layer w0.3: J2.2 44.27,14.97 45.4,16.1 U1.24
pads on no net: FID1.F FID2.F FID3.F J9.2 J9.3 PB1.S PB2.S PB3.S U1.1 U1.6 U1.9 U1.10 U1.11 U1.12 U1.15 U1.16 U1.17 U1.21 U1.23 U1.26 U1.30 U5.4 U6.4 X1.1

## Polygon pours and split planes (outlines as drawn)
+3V3 on Top Layer "TOP_LAYER_+3V3_P009" (solid, remove dead copper, pour order 9): 59.7,30.1 59.7,28.5 60,28.2 67.4,28.2 67.8,27.8 67.8,23.9 67.5,23.6 65,23.6 64.7,23.3 64.7,22.3 64.9,22.1 65.5,22.1 67.8,19.8 67.8,16.4 62.3,10.9 62.3,6.4 61,5.1 58.6,5.1 58.6,3.6 61.5,3.6 63.9,6 63.9,9.2 70.2,15.5 70.2,30 69.8,30.4 60,30.4
GND on Top Layer "TOP_LAYER_GND_P012" (solid, remove dead copper, pour order 12): -0.001,0 -0.001,89 109.999,89 109.999,0
NetC11_2 on Top Layer "TOP_LAYER_NETC11_2_P011" (solid, remove dead copper, pour order 11): 77.1,70.7 78,70.7 78.2,70.9 78.2,71.927 78.445,72.2 79.029,72.2 79.5,72.671 79.5,74.1 80,74.6 81.15,74.6 88.1,74.6 88.1,76 80.8,76 80.1,76.7 77.1,76.7 76.9,76.5 76.9,70.9
+5V on Top Layer "TOP_LAYER_+5V_P006" (solid, remove dead copper, pour order 6): 29.2,70.5 29.2,75.2 29.7,75.7 34.3,75.7 37.1,72.9 37.1,44.2 44.3,37 63.2,37 77,50.8 77,69.103 77.203,69.3 80.9,69.3 81.1,69.1 81.1,48.3 65.3,32.5 42,32.5 32.6,41.9 32.6,51.516 32.6,67.1
+5V on Top Layer "TOP_LAYER_+5V_P010" (solid, remove dead copper, pour order 10): 52.4,32.8 53.7,31.5 53.7,28.5 54,28.2 56.7,28.2 57,28.5 58.1,28.5 58.3,28.7 58.3,31.5 59.6,32.8
NetD1_2 on Top Layer "TOP_LAYER_NETD1_2_P000" (solid, remove dead copper, pour order 0): 19.5,48.9 24.1,48.9 24.4,49.2 24.4,51.1 24.4,52.4 24.2,52.6 21.5,52.6 21,52.1 19.5,52.1 19.25,51.85 19.25,49.15
+5V on Top Layer "TOP_LAYER_+5V_P004" (solid, remove dead copper, pour order 4): 24.1,48.7 19.5,48.7 19.25,48.45 19.25,46.35 19.6,46 19.6,41.1 19.8,40.9 21.1,40.9 21.3,41.1 21.3,44.1 21.6,44.4 24.1,44.4 24.4,44.7 24.4,48.4
+24V on Top Layer "TOP_LAYER_+24V_P005" (solid, remove dead copper, pour order 5): 12.093,52.907 20.107,52.907 20.593,53.393 20.593,61.607 20.309,61.891 15.649,61.891 15.38,61.577 15.38,57.028 14.655,56.398 10.507,56.407 10,55.9 10,52.996 10.503,52.5 11.686,52.5
+5V on Top Layer "TOP_LAYER_+5V_P007" (solid, pour order 7): 20.682,40.9 35.4,40.9 35.4,44.1 32.6,44.1 31.9,43.4 25.1,43.4 24.4,44.1 24.4,44.85 20.682,44.85
no net on Top Layer "TOP_LAYER_NONET_P008" (solid, remove dead copper, pour order 8): 20.511,43.834
GND on Bottom Layer "BOTTOM_LAYER_GND_P002" (solid, remove dead copper, pour order 2): 0,0 0,89 110,89 110,0

## Keep-outs
Keep-Out Layer:
  circle w0.1: c106,85 r4
  circle w0.1: c4,4 r4
  circle w0.1: c106,4 r4
  circle w0.1: c73,85 r4
  circle w0.1: c37,85 r4
  circle w0.1: c4,85 r4
  lines w0.1: 0.5,9.5 2,8 4.006,8 ; 0.5,79.5 2,81 4,81 ; 8,4 8,2 9.5,0.5 ; 8,84.994 8,87 9.5,88.5 ; 31.5,88.5 33,87 33,85 ; 36.994,81 39,81 41.5,78.5 ; 49.5,46.494 51,44.994 51,42.994 ; 51,43 ccw(c55,43) 59,43 ; 59,42.994 59,45 60.5,46.5 ; 68.5,78.5 71,81 73,81 ; 77,84.994 77,87 78.5,88.5 ; 100.5,0.5 102,2 102,4.006 ; 100.5,88.5 102,87 102,85 ; 105.994,81 108,81 109.5,79.5 ; 106,8 108,8 109.5,9.5
  lines w0.2: 41.2,66.4 41.2,72.6 ; 64.2,66.4 64.2,72.6 ; 68.8,66.4 68.8,72.6

## Other copper
Top Layer:
  rectangle net NetC11_2: 86.4,74.6 87.5,76
  region net +3V3: 59,5.1 60.5,5.1 60.5,3.6 59,3.6
  region net +3V3: 66.7,23.2 68.1,23.2 68.1,20.95 66.7,20.95

## Silkscreen, mask and mechanical layers (free items; w line width, h text height)
Top Overlay:
  text ".ProjectCode" at 107.5,45.5 h2.8 r90
  text "CR2032" at 91,39.6 h1.6
  text "GND" at 39.55,7.05 h0.8 r90
  text "SWCLK" at 42.15,7.05 h0.8 r90
  text "SWDIO" at 44.75,7.05 h0.8 r90
  text "+3V3" at 47.25,7.05 h0.8 r90
Top Solder:
  region: 45.6,72.2 44.6,72.2 44.6,66.8 45.6,66.8
  region: 42.4,72.2 41.4,72.2 41.4,66.8 42.4,66.8
  region: 57.7,49.6 57.7,50.6 52.3,50.6 52.3,49.6
  region: 57.7,46.4 57.7,47.4 52.3,47.4 52.3,46.4
  rectangle: 67.6,66.8 68.6,72.2
  rectangle: 64.4,66.8 65.4,72.2
Bottom Solder:
  region: 45.6,72.2 44.6,72.2 44.6,66.8 45.6,66.8
  region: 42.4,72.2 41.4,72.2 41.4,66.8 42.4,66.8
  region: 57.7,49.6 57.7,50.6 52.3,50.6 52.3,49.6
  region: 57.7,46.4 57.7,47.4 52.3,47.4 52.3,46.4
  rectangle: 67.6,66.8 68.6,72.2
  rectangle: 64.4,66.8 65.4,72.2
Board:
  lines w0.1: 45,66.5 ccw(c43.5,66.5) 42,66.5 42,52 ccw(c47,52) 47,47 52,47 ccw(c52,48.5) 52,50 ; 45,66.505 45,52 ccw(c47,52) 47,50 52.004,50 ; 57.996,50 63,50 ccw(c63,52) 65,52 65,66.5 cw(c66.5,66.5) 68,66.5 68,52 cw(c63,52) 63,47 58,47 cw(c58,48.5) 58,50 ; 0,4 ccw(c4,4) 4,0 36,0 ccw(c36,2) 37.732,1 cw(c39.464,0) 39.464,2 70.536,2 cw(c70.536,0) 72.268,1 ccw(c74,2) 74,0 106,0 ccw(c106,4) 110,4 110,85 ccw(c106,85) 106,89 73,89 ccw(c73,84) 68,84 68,72.5 cw(c66.5,72.5) 65,72.5 65,87 ccw(c63,87) 63,89 47,89 ccw(c47,87) 45,87 45,72.5 cw(c43.5,72.5) 42,72.5 42,84 ccw(c37,84) 37,89 4,89 ccw(c4,85) 0,85 0,4

## Text inside footprints (layer, text, board x,y; h text height)
J1: Bottom Overlay "1" at 61,4.85 h1 r180
J2: Top Overlay "1" at 46.6,14.3 h1